# Altium PCB Digital PCB.PcbDoc
Units mil, origin at the board's own origin, x right, y up, seen from the top; angles counter-clockwise.
Board outline 7650 x 4700 mil, 2 copper layers (Top Layer, Bottom Layer), stack 61.2 mil thick; 11 components, 0 nets, 48 pads, 0 vias.
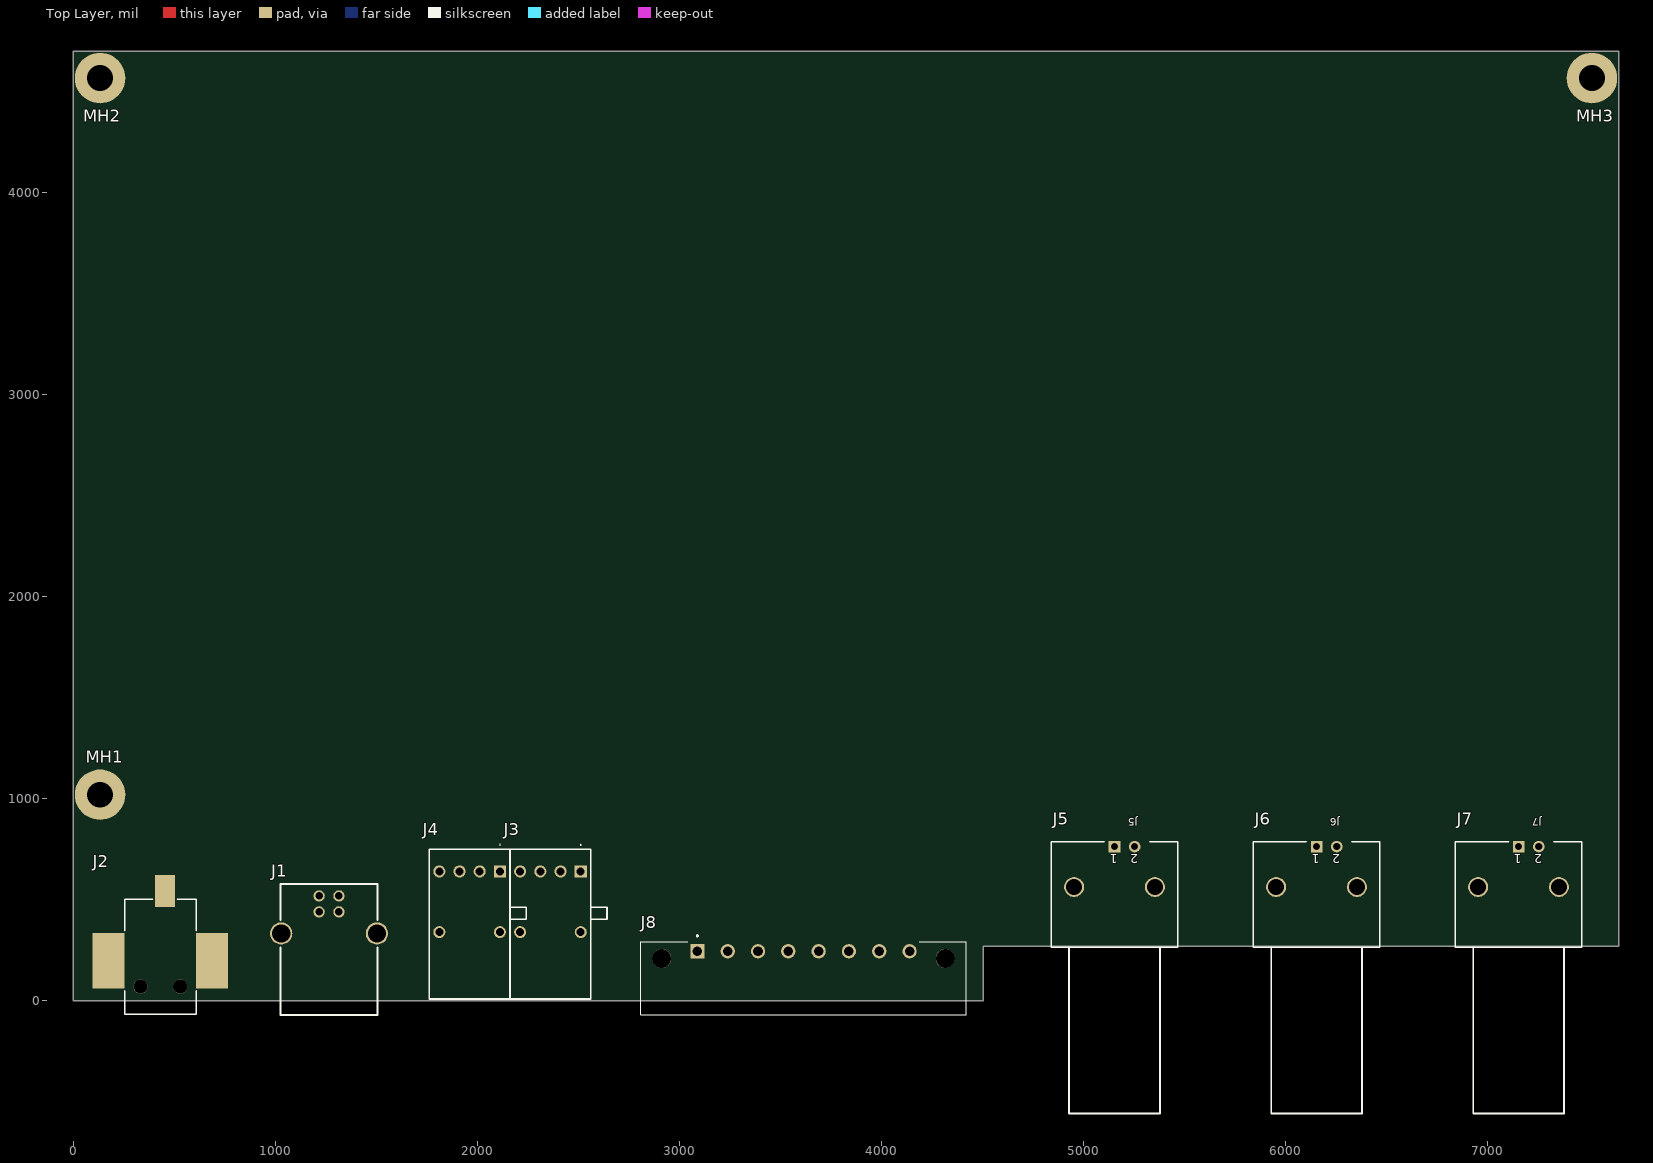
[diagram p0: Top Layer view]
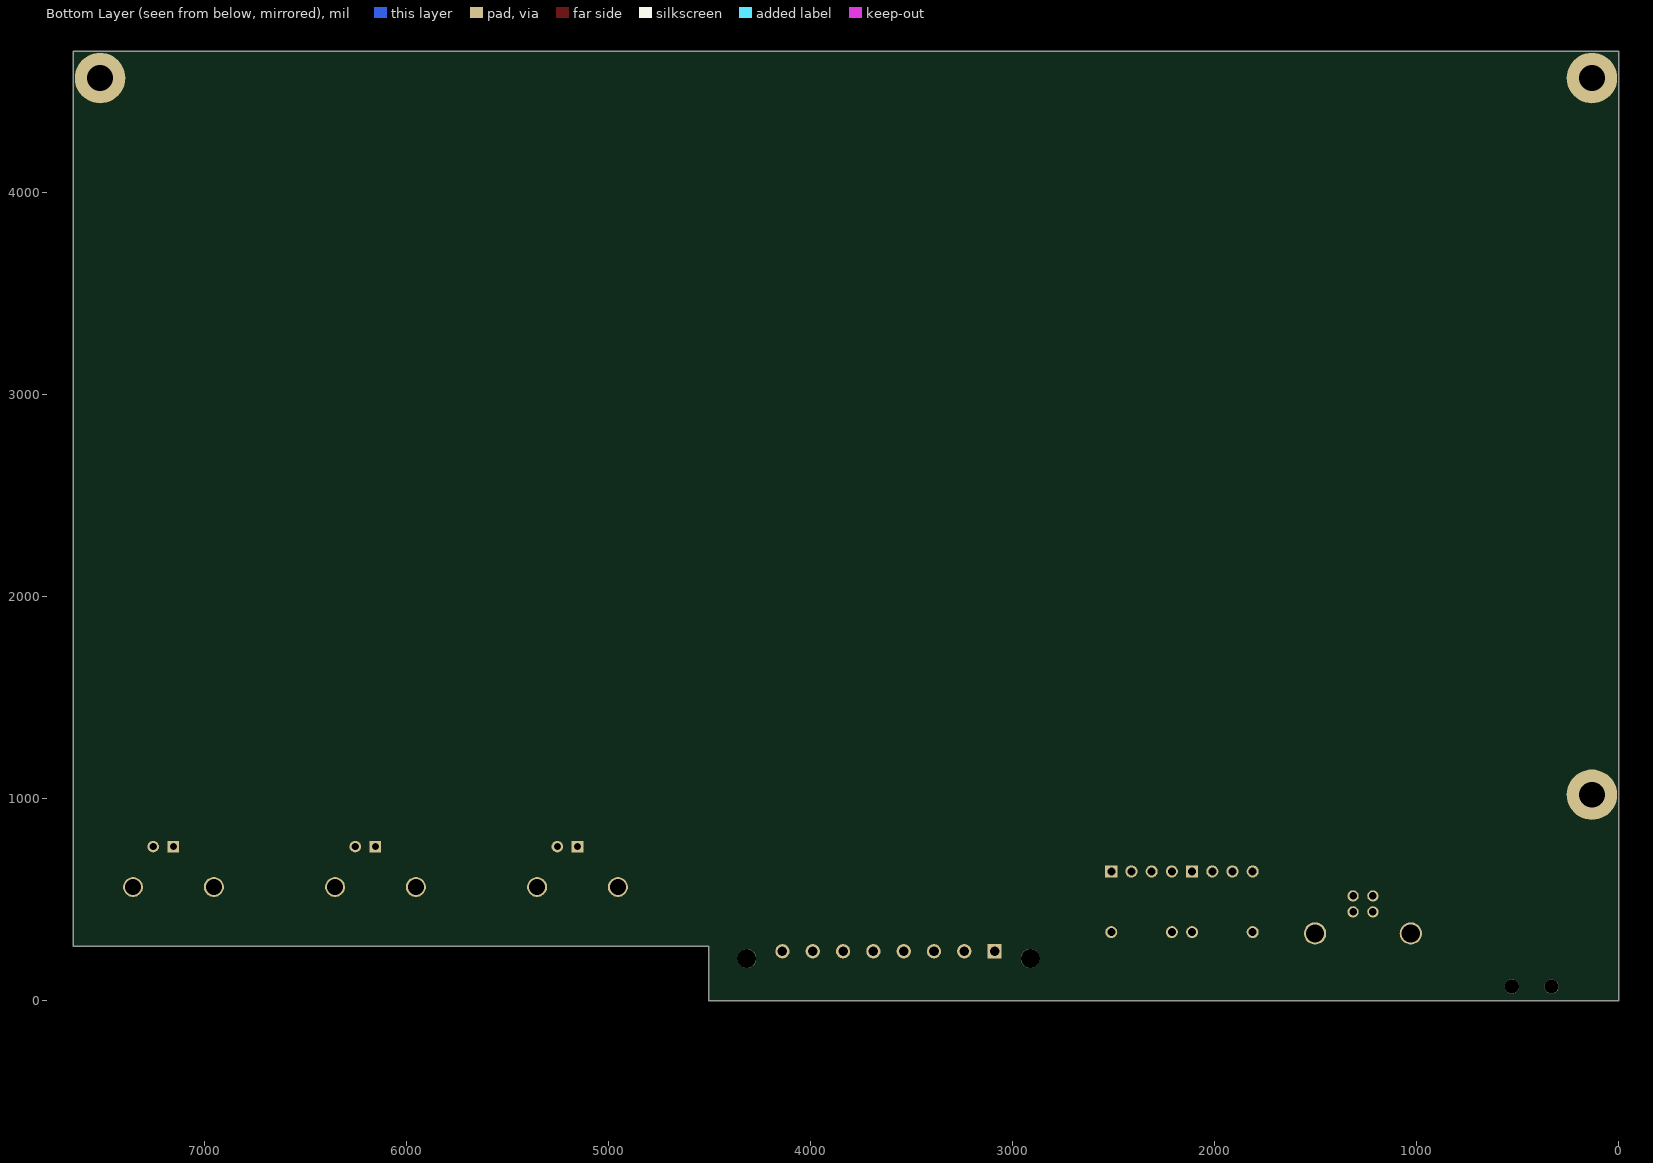
[diagram p1: Bottom Layer view, seen from below]

## Layer stack, top to bottom
Top Solder: solder mask 0.4, Solder Resist, Dk 3.5
Top Layer: signal copper 1.4
Dielectric 1: dielectric 58.4, FR-4, Dk 4.8
Bottom Layer: signal copper 1.4
Bottom Solder: solder mask 0.4, Solder Resist, Dk 3.5

## Board outline
4505,0 4505,270 7650,270 7650,4700 0,4700 0,0

## Design rules (kind name [scope] priority, off if disabled: settings)
Clearance [All] p1: gap=10 ignorepadtopadclearanceinfootprint=FALSE
PolygonConnect [All] p1: connectstyle=Relief reliefconductorwidth=10 reliefentries=4 polygonreliefangle="90 Angle" airgapwidth=10
RoutingVias [All] p1: holewidth=28 width=50 viastyle="Through Hole" minholewidth=28 minwidth=50 maxholewidth=28 maxwidth=50
SolderMaskExpansion [All] p1: expansion=4 istentingtop=FALSE
Width [All] p1: maxlimit=10 minlimit=10 preferedwidth=10
30 further rules are at their usual default settings.

## Classes and differential pairs
component class "Signal IO": J2 J5 J6 J7 J8 MH1 MH2 MH3
component class Comms: J1 J3 J4

## Components (designator, comment, footprint, x,y, rotation, side; value= is the part's Value field where it differs from the comment)
J1 "USB-R" USB-R 1217,440 r0 top value="4 PIN, USB"
J2 "694106105102" 694106105102 431.22,217.89 r0 top
J3 "HFBR-1523Z" HFBR1523Z 2512,640 r0 top
J4 "HFBR-1523Z" HFBR1523Z 2112,640 r0 top
J5 "BNC" URF/BNC/R1.350/FIXED 5154,763 r180 top value="RT ANGLE"
J6 "BNC" URF/BNC/R1.350/FIXED 6154,763 r180 top value="RT ANGLE"
J7 "BNC" URF/BNC/R1.350/FIXED 7154,763 r180 top value="RT ANGLE"
J8 "1827923" PHOENIX_1827923 2810,-70 r0 top
MH1 "HOLE_128" HOLE_128#1 180,1020 r0 top
MH2 "HOLE_128" HOLE_128#2 150,4460 r0 top
MH3 "HOLE_128" HOLE_128#3 7470,4567 r0 top

## Footprints (in the part's own frame and the unit in brackets; to place one, negate y for a bottom-side part, rotate by r counter-clockwise, add the part's x,y. Pads: shape width x height; smd on the part's side, far side on the other; paste and mask are expansions set on the pad)
694106105102 [mm] "DC Power Jack Right Angled SMT ?6.4 with pegs"
  rect 2.5x4 smd: 1(0.6,8.25)
  rect 4x7 smd: 2(-6.5,-0.5) 3(6.5,-0.5)
  round 1.8 hole 1.8 unplated: MH1(-2.5,-3.75) MH2(2.5,-3.75)
  silkscreen extent -4.5,-7.25 4.5,7.25, body extent -7.6,-7.25 7.6,9.75, height 11.05
HFBR1523Z [mm]
  rect 1.515x1.515 hole 1.01: 1(0,0)
  round 1.515 hole 1.01: 2(-2.54,0) 3(-5.08,0) 4(-7.62,0) 5(-7.62,-7.62) 8(0,-7.62)
  silkscreen extent -8.89,-16.03 3.3,3.4, body extent -8.88,-16.01 3.31,2.8, height 8.22
HOLE_128#1 [mil]
  round 250 hole 128: 1(-47,0)
HOLE_128#2 [mil]
  round 250 hole 128: 1(-17,107)
HOLE_128#3 [mil]
  round 250 hole 128: 1(47,0)
PHOENIX_1827923 [mm]
  rect 1.8x1.8 / inner round 1.8 / far side rect 1.8x1.8 hole 1.2: 1(7.1,8)
  round 1.8 hole 1.2: 2(10.91,8) 3(14.72,8) 4(18.53,8) 5(22.34,8) 6(26.15,8) 7(29.96,8) 8(33.77,8)
  round 2.4 hole 2.4 unplated: ""(2.6,7.1) ""(38.27,7.1)
  silkscreen extent 0,0 40.87,10.05, body extent 0.01,0 40.88,9.2, height 7.25
URF/BNC/R1.350/FIXED [mil]
  rect 57x57 / inner round 57 / far side rect 57x57 hole 35: 1(0,0)
  round 57 hole 35: 2(-100,0)
  round 99 hole 79: Hole5(-200,200) Hole6(200,200)
  silkscreen extent -313,-25 312,1321, body extent -289,-78 292,1322, height 626
USB-R [mil]
  round 56 hole 37 mask+4.97: 1(98.42,78.73) 2(0,78.73) 3(0,0) 4(98.42,0)
  round 110 hole 90 mask+4.97: 5(-187.78,-106.68) 6(286.22,-106.68)
  silkscreen extent -190,-511 290,138, body extent -237,-515 333,135, height 421

## Part data
J1: library part 1-00350, "Conn USB 2.0 Type B RCP 4 POS 2.48mm Solder RA Thru-Hole 4 Terminal 1 Port Tube", Cat1=Other, Cat2=Other, Cat3=Other, ComponentLink1Description=datasheet, ComponentLink1URL=http://ventura.corp.thinksrs.com/datasheets/100350/datasheet.pdf, ComponentLink2Description=Info, ComponentLink2URL=http://srsdata.corp.thinksrs.com:3838/ShinyParts/?Detail=100350, Manf=MILLMAX, Manf P/N=897-43-004-90-000000, Part Number=1-00350, Type=Connector\Other
J2: library part CMP-1502-00176-2, Color=Black, Current Rating=5A, Flammability Rating="UL94 V-0", Insulation Resistance=100MΩ, Max Operating Temperature=85°C, Min Operating Temperature=-40°C, Operating Supply Voltage=24V, Connector Type=Power, Contact Gender=Female, Contact Material=Gold, Contact Plating=Tin, Gender=Male, Height=11.2mm, Housing Material=Polyamide, Mount="Surface Mount", NexarPartId=52645183, Number Of Contacts=3, Packaging="Tape and Reel", REACH SVHC=Unknown, RoHS=Compliant, Shielding=Unshielded, Termination=SMD/SMT, Voltage Rating=24V, Voltage Rating (DC)=24V
J3 J4: "FIBER OPTIC TRANSMITTER, 0.04Mbps, THROUGH HOLE MOUNT, DIP", Manufacturer_Name="Avago Technologies", Mouser Part Number=630-HFBR-1523Z, Datasheet Link=https://docs.broadcom.com/doc/AV02-1501EN, Geometry.Height=7.62mm, Manufacturer_Part_Number=HFBR-1523Z, Mouser Price/Stock=https://www.mouser.co.uk/ProductDetail/Broadcom-Avago/HFBR-1523Z?qs=jT9z6tsiFNlmblhCFyzz5A%3D%3D
J5 J6 J7: library part 1-00233, "BNC, PCB Panel Mount, Right Angle, Isolated", Cat1=Thru-hole, Cat2=Coax, Cat3=BNC, ComponentLink1Description=datasheet, ComponentLink1URL=http://ventura.corp.thinksrs.com/datasheets/100233/datasheet.pdf, ComponentLink2Description=Info, ComponentLink2URL=http://srsdata.corp.thinksrs.com:3838/ShinyParts/?Detail=100233, Manf=TYCO, Manf P/N=5227161-3, Part Number=1-00233, Type=Connector\Thru-hole\Coax\BNC
J8: "Pluggable Header 3.81mm 16AWG 160V 8A 8 Position COMBICON MC Series", Package=None, Check_prices=https://www.snapeda.com/parts/1827923/Phoenix+Contact/view-part/?ref=eda, MF="Phoenix Contact", MP=1827923, SnapEDA_Link=https://www.snapeda.com/parts/1827923/Phoenix+Contact/view-part/?ref=snap
MH1 MH2 MH3: "0.128 mounting hole, clearance for 4-40"

## Nets (pads, with @x,y where several pads share a name; then routed paths per layer and width w, separated by ;. In a path a pad name is that pad's centre, name@x,y a point inside that pad or via, vN(x,y) a via of type N, cw(c..) or ccw(c..) an arc to the next point about the centre after c; other vN are vias at no path point)
pads on no net: J1.1 J1.2 J1.3 J1.4 J1.5 J1.6 J2.1 J2.2 J2.3 J2.MH1 J2.MH2 J3.1 J3.2 J3.3 J3.4 J3.5 J3.8 J4.1 J4.2 J4.3 J4.4 J4.5 J4.8 J5.1 J5.2 J5.Hole5 J5.Hole6 J6.1 J6.2 J6.Hole5 J6.Hole6 J7.1 J7.2 J7.Hole5 J7.Hole6 J8. J8.1 J8.2 J8.3 J8.4 J8.5 J8.6 J8.7 J8.8 MH1.1 MH2.1 MH3.1

## Dimensions
7650,270 to 7154,763 on Drill Drawing
6154,763 to 7154,763 on Drill Drawing
5154,763 to 6154,763 on Drill Drawing
0,0 to 5154,763 on Drill Drawing
0,0 to 133,1020 on Drill Drawing
0,0 to 133,4567 on Drill Drawing
0,0 to 133,1020 on Drill Drawing
0,0 to 4505,0 on Drill Drawing
4505,0 to 4505,270 on Drill Drawing
0,0 to 0,4700 on Drill Drawing
0,4700 to 7650,4700 on Drill Drawing

## Text inside footprints (layer, text, board x,y; h text height)
J5: Top Overlay "2" at 5270.67,724.75 h45 r180; Top Overlay "1" at 5170.67,724.75 h45 r180; Mechanical 1 "2" at 5270.67,724.75 h45 r180; Mechanical 1 "1" at 5170.67,724.75 h45 r180
J6: Top Overlay "2" at 6270.67,724.75 h45 r180; Top Overlay "1" at 6170.67,724.75 h45 r180; Mechanical 1 "2" at 6270.67,724.75 h45 r180; Mechanical 1 "1" at 6170.67,724.75 h45 r180
J7: Top Overlay "2" at 7270.67,724.75 h45 r180; Top Overlay "1" at 7170.67,724.75 h45 r180; Mechanical 1 "2" at 7270.67,724.75 h45 r180; Mechanical 1 "1" at 7170.67,724.75 h45 r180